# Altium PCB MainBoard3.PcbDoc
Units mm, origin at the board's own origin, x right, y up, seen from the top; angles counter-clockwise.
Board outline 140.3 x 94.24 mm, 2 copper layers (Top Layer, Bottom Layer); 100 components, 180 nets, 374 pads, 0 vias.
Unrouted connection lines stored in the file: 205.
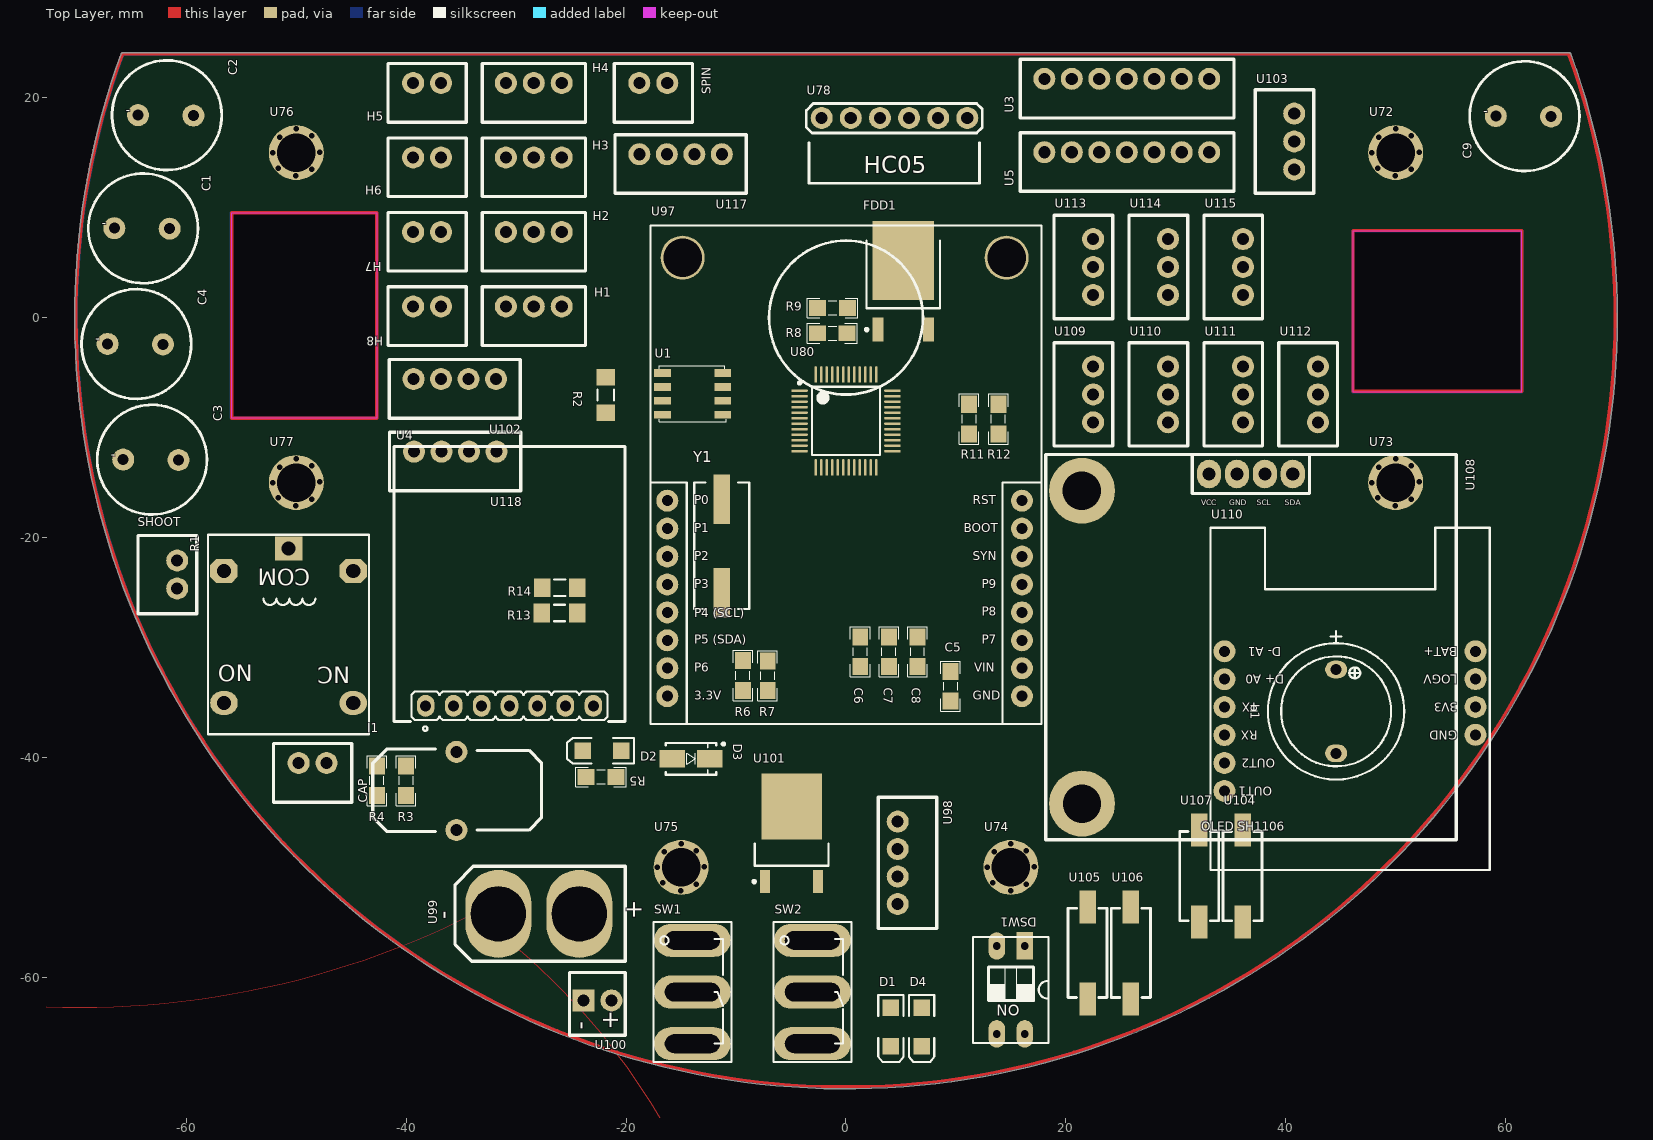
[diagram p0: Top Layer view]
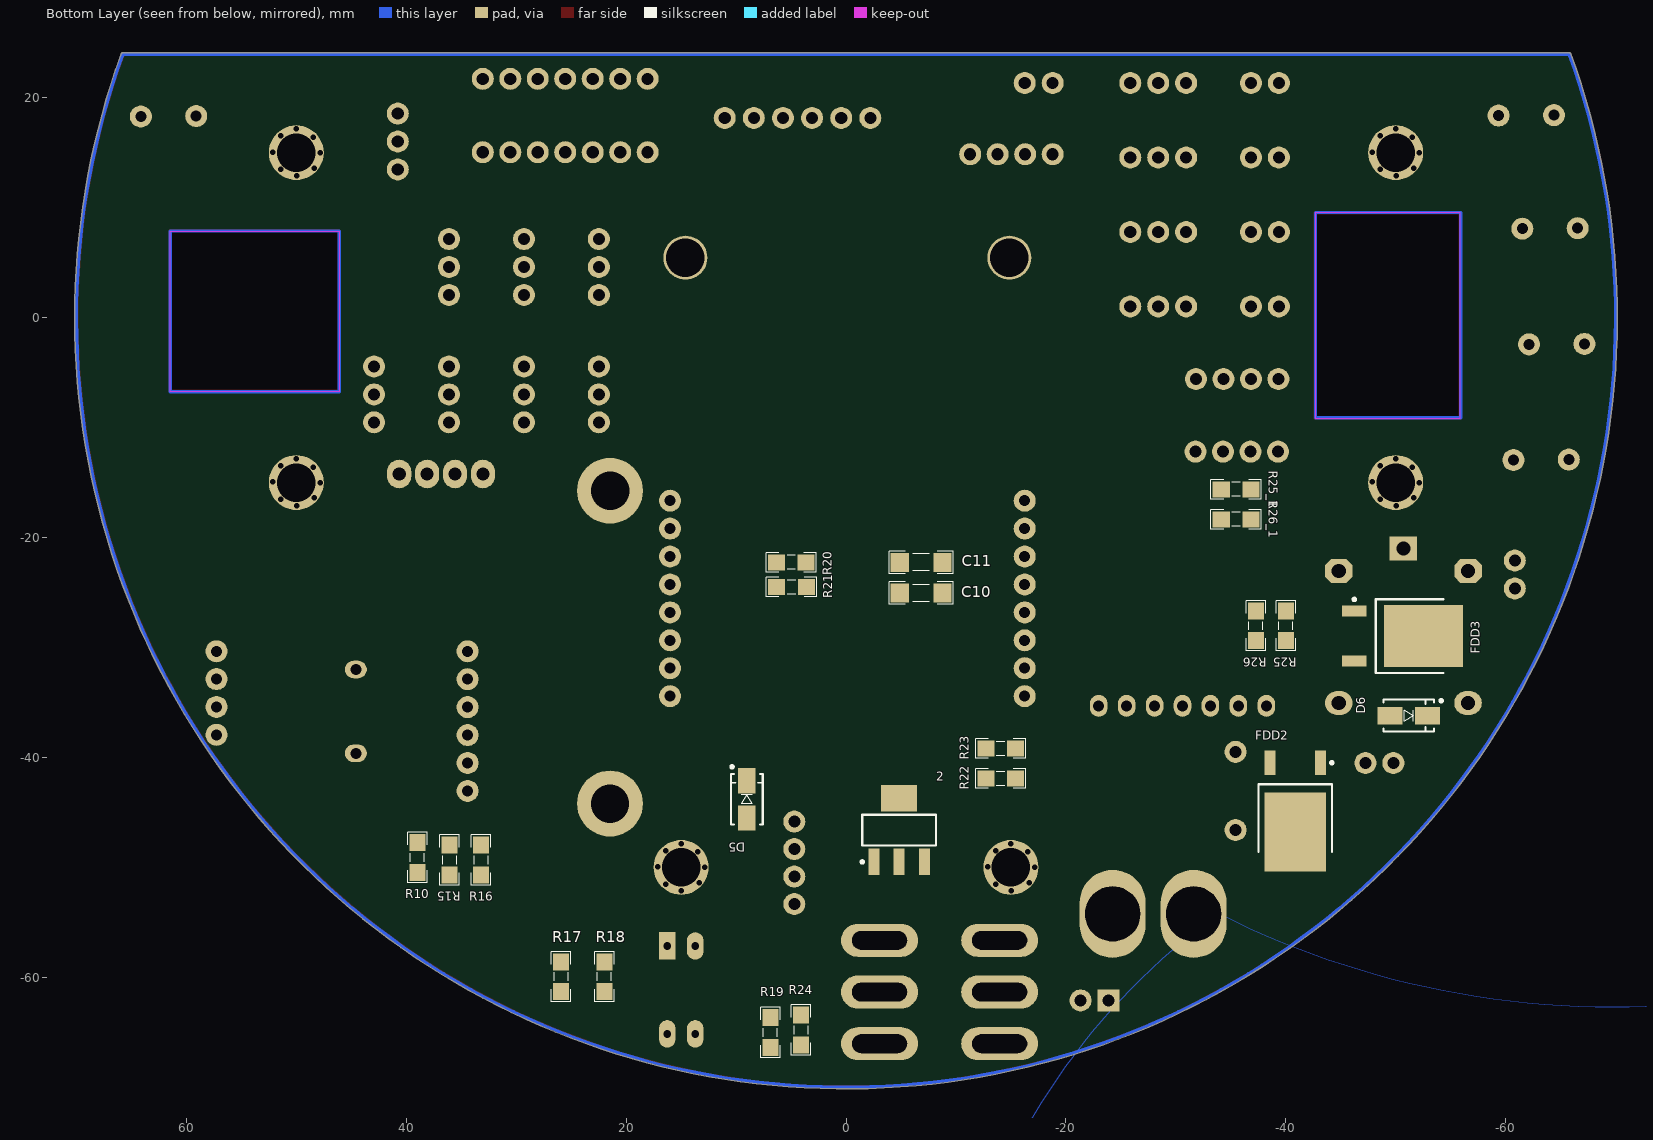
[diagram p1: Bottom Layer view, seen from below]

## Layer stack, top to bottom
Top Solder: solder mask 0.0102, Solder Resist, Dk 3.5
Top Layer: signal copper 0.0356
Dielectric 1: dielectric 0.32, FR-4, Dk 4.8
Bottom Layer: signal copper 0.0356
Bottom Solder: solder mask 0.0102, Solder Resist, Dk 3.5

## Board outline
-65.92,23.993 ccw(c0,0) 70.15,0 ccw(c0,0) 65.92,23.993 ccw(c65.778,23.941) 65.778,24.092 -65.778,24.092 ccw(c-65.778,23.941)
cut-out: 46.101,-6.731 61.468,-6.731 61.468,7.874 46.101,7.874
cut-out: -42.672,-9.144 -55.88,-9.144 -55.88,9.525 -42.672,9.525

## Design rules (kind name [scope] priority, off if disabled: settings)
Clearance [All] p1: gap=0.6 ignorepadtopadclearanceinfootprint=FALSE except(0.25: Arc-Arc Arc-Track Arc-SMDPad Track-Track Track-SMDPad SMDPad-SMDPad; 0.254: Arc-THPad Arc-Via Arc-Text Arc-Hole Track-THPad Track-Via Track-Text Track-Hole SMDPad-THPad SMDPad-Via SMDPad-Text SMDPad-Hole THPad-THPad THPad-Via THPad-Text THPad-Hole Via-Via Via-Text Via-Hole Text-Text Text-Hole; 0.5: Fill-Text Fill-Hole Poly-Text Poly-Hole Region-Text Region-Hole)
ComponentClearance [All] p1 off: gap=0.254 collisioncheckmode=3 verticalgap=0.254 showdistances=FALSE
Height [All] p1 off: minheight=0 maxheight=25.4 prefheight=12.7
PolygonConnect [All] p1: connectstyle=Direct reliefconductorwidth=0.5 reliefentries=4 polygonreliefangle="90 Angle" airgapwidth=0.5
RoutingVias [All] p1: holewidth=0.3 width=0.6 viastyle="Through Hole" minholewidth=0.25 minwidth=0.25 maxholewidth=1 maxwidth=1
SolderMaskExpansion [All] p1: expansion=0.102 istentingtop=FALSE
Width [All] p1: maxlimit=10 minlimit=0.25 preferedwidth=0.8
28 further rules are at their usual default settings.

## Components (designator, comment, footprint, x,y, rotation, side; value= is the part's Value field where it differs from the comment)
2 "Comment" SOT223_N -4.826,-46.609 r90 bottom
b1 "Comment" "BUZZER 7.62mm DC" 44.577,-35.814 r270 top
C1 "Comment" "MY_CAP_POL 10MM" -64.031,8.108 r180 top
C2 "Comment" "MY_CAP_POL 10MM" -61.872,18.395 r180 top
C3 "Comment" "MY_CAP_POL 10MM" -63.223,-12.934 r180 top
C4 "Comment" "MY_CAP_POL 10MM" -64.643,-2.413 r180 top
C5 "Comment" CAPC3413X12N 9.525,-33.528 r270 top
C6 "Comment" CAPC3413X12N 1.295,-30.392 r90 top
C7 "Comment" CAPC3413X12N 3.899,-30.392 r90 top
C8 "Comment" CAPC3413X12N 6.502,-30.392 r90 top
C9 "Comment" "MY_CAP_POL 10MM" 61.618,18.308 r180 top
C10 "0.1uF" CAPC4817X12N -6.833,-25.058 r0 bottom (schematic designator C12)
C11 "0.1uF" CAPC4817X12N -6.833,-22.264 r0 bottom
CAP "Comment" "XH 2pin" -48.514,-41.402 r180 top
D1 "SMD 1206 LED" "LED 1206" 4.089,-64.516 r270 top (schematic designator D2)
D2 "SMD 1206 LED" "LED 1206" -22.171,-39.395 r180 top
D3 "1n4007" DIOM4629X24N -14.097,-40.132 r0 top
D4 "SMD 1206 LED" "LED 1206" 6.883,-64.516 r270 top (schematic designator D2)
D5 "1n4007" DIOM4629X24N 9.017,-43.815 r90 bottom
D6 "1n4007" DIOM4629X24N -51.181,-36.195 r180 bottom (schematic designator D3)
DSW1 "Comment" "DIP Switch x2" 16.256,-57.151 r180 top
FDD1 "Comment" TO252-3M 5.207,3.307 r90 top
FDD2 "Comment" TO252-3M -40.861,-44.888 r270 bottom
FDD3 "Comment" TO252-3M -50.628,-28.962 r180 bottom
H1 "Comment" "XH 3PIN" -28.397,0.127 r180 top
H2 "Comment" "XH 3PIN" -28.397,6.9 r180 top
H3 "Comment" "XH 3PIN" -28.397,13.674 r180 top
H4 "Comment" "XH 3PIN" -28.397,20.447 r180 top
H5 "Comment" "XH 2pin" -38.1,20.447 r180 top
H6 "Comment" "XH 2pin" -38.1,13.674 r180 top
H7 "Comment" "XH 2pin" -38.1,6.9 r180 top
H8 "Comment" "XH 2pin" -38.1,0.127 r180 top
I1 "Comment" inductor -35.56,-43.053 r90 top
R1 "Comment" "Relay 18.85x15.35x15.70" -50.698,-28.028 r180 top
R2 "SMD" "Resistor SMD 1206" -21.844,-7.036 r90 top (schematic designator RES5)
R3 "Comment" RESC3413X04N -40.005,-42.117 r270 top
R4 "Comment" RESC3413X04N -42.672,-42.117 r270 top
R5 "1K" RESC3413X04N -22.286,-41.774 r180 top (schematic designator R22)
R6 "Comment" RESC3413X04N -9.373,-32.551 r270 top
R7 "Comment" RESC3413X04N -7.119,-32.574 r270 top
R8 "Comment" RESC3413X04N -1.245,-1.424 r180 top
R9 "Comment" RESC3413X04N -1.223,0.889 r180 top
R10 "Comment" RESC3413X04N 38.989,-49.102 r270 bottom
R11 "1K" RESC3413X04N 11.2,-9.23 r270 top (schematic designator R34)
R12 "1K" RESC3413X04N 13.868,-9.23 r270 top (schematic designator R35)
R13 "SMD" "Resistor SMD 1206" -26.06,-26.862 r0 top (schematic designator RES3)
R14 "SMD" "Resistor SMD 1206" -26.035,-24.576 r180 top (schematic designator RES2)
R15 "1K" RESC3413X04N 36.061,-49.338 r90 bottom (schematic designator R22)
R16 "Comment" RESC3413X04N 33.187,-49.338 r270 bottom
R17 "1K" RESC3413X04N 25.908,-59.944 r270 bottom (schematic designator R23)
R18 "1K" RESC3413X04N 21.971,-59.944 r270 bottom (schematic designator R23)
R19 "1K" RESC3413X04N 6.883,-65.024 r270 bottom (schematic designator R22)
R20 "Comment" RESC3413X04N 4.978,-22.264 r180 bottom
R21 "Comment" RESC3413X04N 4.956,-24.518 r180 bottom
R22 "Comment" RESC3413X04N -14.068,-41.928 r180 bottom
R23 "Comment" RESC3413X04N -14.068,-39.203 r180 bottom
R24 "1K" RESC3413X04N 4.089,-64.798 r270 bottom (schematic designator R22)
R25 "Comment" RESC3413X04N -40.005,-28.032 r90 bottom
R25_1 "Comment" RESC3413X04N -35.48,-15.621 r0 bottom
R26 "Comment" RESC3413X04N -37.279,-28.032 r90 bottom
R26_1 "Comment" RESC3413X04N -35.48,-18.347 r0 bottom
SHOOT "Comment" "XH 2pin" -61.722,-23.368 r90 top
SPIN "Comment" "XH 2pin" -17.526,20.447 r180 top
SW1 "Comment" "Switch SPDT - 500x270x1100x185 mil" -13.97,-61.341 r0 top
SW2 "Comment" "Switch SPDT - 500x270x1100x185 mil" -3.048,-61.341 r0 top
U1 "SN65LB" SOIC8 -13.843,-7.112 r180 top (schematic designator evajedi)
U3 "Comment" "XH 7PIN" 25.513,23.241 r180 top
U4 "TDAxis12" TDAxis12 -30.607,-35.231 r0 top (schematic designator U2)
U5 "Comment" "XH 7PIN" 25.513,16.566 r180 top
U72 "Comment" SCREW 50,15 r0 top locked
U73 "Comment" SCREW 50,-15 r0 top locked
U74 "Comment" SCREW 15,-50 r0 top locked
U75 "Comment" SCREW -15,-50 r0 top locked
U76 "Comment" SCREW -50,15 r0 top locked
U77 "Comment" SCREW -50,-15 r0 top locked
U78 "Comment" HC05 4.392,12.861 r0 top
U80 "Comment" STM32F103C8T6 0,-9.398 r0 top
U97 "Comment" OpenMV 0,-15 r0 top locked
U98 "Comment" "XH 4PIN" 5.588,-49.593 r270 top
U99 "Comment" XT60 -26.416,-54.229 r270 top
U100 "Comment" "H2 MOLEX" -22.606,-62.484 r270 top
U101 "Comment" "7805 (SOT-252)" -4.953,-46.9 r90 top
U102 "Comment" "XH 4PIN" -35.583,-6.477 r180 top
U103 "Comment" "XH 3PIN" 39.878,16.016 r90 top
U104 "Comment" pushbutton 36.068,-50.8 r90 top
U105 "Comment" pushbutton 21.971,-57.785 r90 top
U106 "Comment" pushbutton 25.908,-57.785 r90 top
U107 "Comment" pushbutton 32.131,-50.8 r90 top
U108 "Comment" "OLED SH1106" 36.83,-29.972 r0 top
U109 "Comment" "XH 3PIN" 21.59,-6.985 r90 top
U110 "Comment" "RCJ Communication Module" 45.85,-30.037 r180 top
U110 "Comment" "XH 3PIN" 28.406,-6.985 r90 top
U111 "Comment" "XH 3PIN" 35.221,-6.985 r90 top
U112 "Comment" "XH 3PIN" 42.037,-6.985 r90 top
U113 "Comment" "XH 3PIN" 21.59,4.602 r90 top
U114 "Comment" "XH 3PIN" 28.406,4.602 r90 top
U115 "Comment" "XH 3PIN" 35.221,4.602 r90 top
U117 "Comment" "XH 4PIN" -15.049,13.97 r180 top
U118 "Comment" "XH 4PIN" -35.543,-13.081 r180 top
Y1 "12 MHz" "Crystal SMD" -11.303,-20.76 r90 top

## Footprints (in the part's own frame and the unit in brackets; to place one, negate y for a bottom-side part, rotate by r counter-clockwise, add the part's x,y. Pads: shape width x height; smd on the part's side, far side on the other; paste and mask are expansions set on the pad)
"7805 (SOT-252)" [mm] "D-PAK, 3-Pads, Body 6.25x6.71mm (max), IPC Medium Density"
  rect 2.1x0.9 smd: 1(-4.4,2.4) 3(-4.4,-2.4)
  rect 6x5.5 smd: 4(2.45,0)
  silkscreen extent -4.52,-3.35 -0.95,3.52, body extent -5.06,-3.35 4.85,3.35, height 2.45
"BUZZER 7.62mm DC" [mm] "BUZZER 12mm DIA , 7.62mm pitch DESIGNER ABBAS BASEREH"
  oval 1.6x2 hole 1: 1(-3.81,0) 2(3.81,0)
  silkscreen extent -7.3,-6.2 6.2,6.2, body extent -6,-6 6,6, height 9.5
CAPC3413X12N [mm] "Chip Capacitor, 2-Leads, Body 3/40x1/30mm, IPC Medium Density-Design:Abbas Basereh"
  rect 1.55x1.45 smd: 1(-1.35,0) 2(1.35,0)
  silkscreen extent -2.29,-0.89 2.29,0.89, body extent -1,-0.62 1,0.63, height 0.78
CAPC4817X12N [mm] "Chip Capacitor, 2-Leads, Body 4/80x1/70mm, IPC Medium Density-Design:Abbas Basereh"
  rect 1.65x1.75 smd: 1(-1.95,0) 2(1.95,0)
  silkscreen extent -2.92,-1.02 2.92,1.02, body extent -1.6,-0.8 1.6,0.8, height 1
"Crystal SMD" [mm] "DESIGNER ABBAS BASEREH"
  rect 4.5x1.5 smd: 1(-4.25,0) 2(4.25,0)
  silkscreen extent -5.75,-2.5 5.75,2.5, body extent -6.21,-2.25 6.09,2.25, height 5.18
DIOM4629X24N [mm] "Molded Diode, 2-Leads, Body 4/60x2/90mm, IPC Medium Density-Design:Abbas Basereh"
  rect 2.3x1.6 smd: 1(-1.7,0) 2(1.7,0)
  silkscreen extent -2.3,-1.45 3.08,1.47, body extent -2.5,-1.22 2.5,1.48, height 2.2
"DIP Switch x2" [mm] "Switch DIP 2 way flat slide Thru-Hole-Design:Ali Hafizi"
  rect 1.5x2.5 hole 0.7: 1(0,0)
  oval 1.5x2.5 hole 0.7: 2(2.54,0) 3(2.54,8) 4(0,8)
  silkscreen extent -2.16,-0.82 4.71,8.83, body extent -1.98,-1.03 4.52,8.97, height 6.91
"H2 MOLEX" [mm]
  round 2 hole 1.1: 1(-0.381,1.27)
  rect 2x2 hole 1.1: 2(-0.381,-1.27)
  silkscreen extent -2.92,-2.54 2.79,2.54, body extent -2.9,-2.54 2.9,2.54, height 11.24
HC05 [mm]
  round 2 hole 1.1: 1(-6.605,5.3) 2(-3.956,5.3) 3(-1.308,5.3) 4(1.341,5.3) 5(3.99,5.3) 6(6.639,5.3)
  silkscreen extent -8,-0.64 8,6.6, body extent -8,-1 8,5.55, height 39.5
inductor [mm]
  round 2 hole 1.1: 1(-3.556,-0.127) 2(3.556,-0.127)
  silkscreen extent -3.68,-7.87 3.81,7.49, body extent -4.15,-8.42 4.15,8.17, height 16.29
"LED 1206" [mm]
  rect 1.5x1.5 smd: 1(-1.75,0) 2(1.75,0)
  silkscreen extent -2.9,-1.15 3.2,1.15, body extent -1.65,-0.72 1.65,0.73, height 1.36
"MY_CAP_POL 10MM" [mm]
  round 2 hole 1: +(-2.517,0.02) -(2.517,-0.02)
  silkscreen extent -5.09,-5 4.88,4.98, body extent -5.13,-5.07 5.03,5.09, height 10.16
"OLED SH1106" [mm]
  oval 2.2x2.6 hole 1.2: 1(-3.81,15.748) 2(-1.27,15.748) 3(1.27,15.748) 4(3.81,15.748)
  round 6 hole 3.5: ""(-15.367,14.224) ""(-15.365,-14.23)
  silkscreen extent -18.67,-17.53 18.67,17.53, body extent -18,-17 18,17, height 9.6
OpenMV [mm]
  round 2 hole 1: 1(-16.256,-19.431) 2(-16.256,-16.891) 3(-16.256,-14.351) 4(-16.256,-11.811) 5(-16.256,-9.271) 6(-16.256,-6.731) 7(-16.256,-4.191) 8(-16.256,-1.651) 9(16.002,-19.431) 10(16.002,-16.891) 11(16.002,-14.351) 12(16.002,-11.811) 13(16.002,-9.271) 14(16.002,-6.731) 15(16.002,-4.191) 16(16.002,-1.651)
  round 4 hole 3.5: 17(14.605,20.447) 18(-14.859,20.447)
  silkscreen extent -17.78,-21.97 17.78,23.37, body extent -17.92,-22.12 17.9,23.58, height 38.95
pushbutton [mm]
  rect 3x1.5 smd: 1(-4.191,0) 2(4.191,0)
  silkscreen extent -4.06,-1.78 4.06,1.78, body extent -4.17,-1.82 4.17,1.82, height 4.25
"RCJ Communication Module" [mm]
  round 2 hole 1: 1(-11.407,0.31) 2(-11.407,2.842) 3(-11.407,5.374) 4(-11.407,7.907) 5(11.433,0.31) 6(11.433,2.851) 7(11.433,5.392) 8(11.433,7.933) 9(11.433,10.475) 10(11.433,13.016)
  silkscreen extent -12.7,-10.92 12.7,20.19, body extent -12.7,-11.04 12.7,25.4, height 11.35
"Relay 18.85x15.35x15.70" [mm]
  rect 2.5x2.2 hole 1.3: 1(0,-7.025)
  oval 2.5x2.2 hole 1.3: 2(-5.875,7.025) 3(5.875,7.025)
  oct 2.5x2.2 hole 1.3: 4(-5.875,-4.975) 5(5.875,-4.975)
  silkscreen extent -7.33,-8.27 7.33,9.88, body extent -7.37,-8.72 7.63,9.98, height 15.7
RESC3413X04N [mm] "Chip Resistor, 2-Leads, Body 3/40x1/30mm, IPC Medium Density-Design:Abbas Basereh"
  rect 1.55x1.45 smd: 1(-1.35,0) 2(1.35,0)
  silkscreen extent -2.29,-0.89 2.29,0.89, body extent -1.25,-0.62 1.25,0.62, height 0.79
"Resistor SMD 1206" [mm]
  rect 1.5x1.7 smd: 1(-1.6,0) 2(1.6,0)
  silkscreen extent -0.5,-0.75 0.5,0.75, body extent -1.6,-0.8 1.6,0.8, height 0.55
SCREW [mm]
  round 5 hole 3.5: 1(0,0)
  round 0 hole 0.5: ""(-2.159,0) ""(-1.651,-1.397) ""(-1.524,1.397) ""(-0.031,-2.11) ""(0,2.159) ""(1.397,-1.524) ""(1.397,1.524) ""(2.128,0.059)
SOIC8 [mm]
  rect 1.524x0.7 smd: 1(-2.624,1.733) 2(-2.624,0.463) 3(-2.624,-0.807) 4(-2.624,-2.077) 5(2.856,-2.077) 6(2.856,-0.807) 7(2.856,0.463) 8(2.856,1.733)
  silkscreen extent -2.93,-2.71 3.16,2.37, body extent -2.88,-2.62 3.12,2.28, height 1.75
SOT223_N [mm] "SOT223, 4-Leads, Body 6.5x3.5mm, Pitch 2.3mm, Lead Span 7mm, IPC Medium Density"
  rect 2.4x1 smd: 1(-2.9,2.3) 2(-2.9,0) 3(-2.9,-2.3)
  rect 2.4x3.3 smd: 4(2.9,0)
  silkscreen extent -3.02,-3.35 1.4,3.48, body extent -1.85,-3.35 1.85,3.35, height 1.7
STM32F103C8T6 [mm] "TSQFP, 48-Leads, Body 7.00x7.00mm, Pitch 0.50mm, IPC Medium Density"
  oval 1.5x0.25 smd: 1(-4.225,2.75) 2(-4.225,2.25) 3(-4.225,1.75) 4(-4.225,1.25) 5(-4.225,0.75) 6(-4.225,0.25) 7(-4.225,-0.25) 8(-4.225,-0.75) 9(-4.225,-1.25) 10(-4.225,-1.75) 11(-4.225,-2.25) 12(-4.225,-2.75) 25(4.225,-2.75) 26(4.225,-2.25) 27(4.225,-1.75) 28(4.225,-1.25) 29(4.225,-0.75) 30(4.225,-0.25) 31(4.225,0.25) 32(4.225,0.75) 33(4.225,1.25) 34(4.225,1.75) 35(4.225,2.25) 36(4.225,2.75)
  oval 0.25x1.5 smd: 13(-2.75,-4.225) 14(-2.25,-4.225) 15(-1.75,-4.225) 16(-1.25,-4.225) 17(-0.75,-4.225) 18(-0.25,-4.225) 19(0.25,-4.225) 20(0.75,-4.225) 21(1.25,-4.225) 22(1.75,-4.225) 23(2.25,-4.225) 24(2.75,-4.225) 37(2.75,4.225) 38(2.25,4.225) 39(1.75,4.225) 40(1.25,4.225) 41(0.75,4.225) 42(0.25,4.225) 43(-0.25,4.225) 44(-0.75,4.225) 45(-1.25,4.225) 46(-1.75,4.225) 47(-2.25,4.225) 48(-2.75,4.225)
  silkscreen extent -4.35,-3.1 3.1,3.57, body extent -4.5,-4.5 4.5,4.5, height 1.6
"Switch SPDT - 500x270x1100x185 mil" [mm]
  oval 7x3 hole 1.7 slot 5 at 0 deg: 1(0,-4.699) 2(0,0) 3(0,4.699)
  silkscreen extent -3.56,-6.35 3.56,6.35, body extent -3.42,-6.35 3.44,6.35, height 28.62
TDAxis12 [mm] "Connector; Header; 7 Position"
  oval 1.6x2 hole 1 mask+0.1: 1(-7.62,-0.075) 2(-5.08,-0.075) 3(-2.54,-0.075) 4(0,-0.075) 5(2.54,-0.075) 6(5.08,-0.075) 7(7.62,-0.075)
  silkscreen extent -10.5,-2.35 10.5,23.5, body extent -10.5,-1.5 10.5,23.5, height 11.39
TO252-3M [mm] "D-PAK, 3-Pads, Body 6.2x6.7mm (max), IPC Low Density"
  rect 2.2x1 smd: 1(-4.4,2.28) 3(-4.4,-2.28)
  rect 7.2x5.6 smd: 4(1.9,0)
  silkscreen extent -4.52,-3.35 3.7,3.45, body extent -5.06,-3.27 4.88,3.27, height 2.39
"XH 2pin" [mm]
  round 2 hole 1.1: 1(-1.27,-0.889) 2(1.27,-0.889)
  silkscreen extent -3.56,-2.67 3.56,2.67, body extent -3.7,-2.88 3.7,2.88, height 7
"XH 3PIN" [mm]
  round 2 hole 1.1: 1(-2.54,-0.889) 2(0,-0.889) 3(2.54,-0.889)
  silkscreen extent -4.7,-2.67 4.7,2.67, body extent -4.95,-2.88 4.95,2.88, height 7
"XH 4PIN" [mm]
  round 2 hole 1.1: 1(-3.753,-0.889) 2(-1.253,-0.889) 3(1.247,-0.889) 4(3.747,-0.889)
  silkscreen extent -5.97,-2.67 5.97,2.67, body extent -6.2,-2.88 6.2,2.88, height 7
"XH 7PIN" [mm]
  round 2 hole 1.1: 1(-7.523,1.524) 2(-5.023,1.524) 3(-2.523,1.524) 4(-0.023,1.524) 5(2.477,1.524) 6(4.977,1.524) 7(7.477,1.524)
  silkscreen extent -9.78,-0.25 9.65,5.08, body extent -9.95,-0.46 9.95,5.29, height 7
XT60 [mm]
  oval 8x6 hole 5: 1(0,2.159) 2(0,-5.207)
  silkscreen extent -4.32,-9.14 4.32,6.35, body extent -3.75,-9.72 3.75,6.83, height 16

## Part data
C10 C11: library part "CAP SMD 1206", "CAP 1206", Data=16-12-2016, Desc.="CAP SMD 1206", Designer="Abbas Basereh"
D1 D2 D4: library part "LED SMD 1206"
D3 D5 D6: library part "1n4007 SMD M7", "Standard Rectifiers", Manufacturer="DC COMPONENTS", Data=16-12-2016, Designer="Abbas Basereh", Link=http://www.tme.eu/en/details/m7/smd-universal-diodes/dc-components/, Part. No=M7
R2 R13 R14: library part "Res SMD"
R5 R11 R12 R15 R17 R18 R19 R24: library part "RES 0805 0.125W", "RES 0805", Data=16-12-2016, Desc.="RES SMD 0805", Designer="Abbas Basereh"
U4: "Module, 12 Axis IMU, I2C UART Output"
Y1: library part XTAL, "XTAL Crystal", ComponentLink1Description=Datasheet, ComponentLink2Description=Reference, Design Date=2017-1-3, Designer="ABBAS BASEREH", Mounting Technology="Surface Mount\Through-Hole", Status=Unreleased

## Nets (pads, with @x,y where several pads share a name; then routed paths per layer and width w, separated by ;. In a path a pad name is that pad's centre, name@x,y a point inside that pad or via, vN(x,y) a via of type N, cw(c..) or ccw(c..) an arc to the next point about the centre after c; other vN are vias at no path point)
3.3V: 
5V: 2.3 C5.2 R1.4 U97.10 U101.3
12V: SW2.3 U101.1
+3.3V: 
+5: 
A: H1.3 H2.3 H3.3 H4.3 R2.2 U1.6
ADC0: U3.1 U80.10 U112.1
ADC1: U5.1 U80.11 U111.1
ADC2: U80.12 U110.1@29.295,-9.525
ADC3: U80.13 U109.1
ADC4: U80.14 U115.1
ADC5: U80.15 U114.1
ADC6: U80.16 U113.1
ADC7: R25_1.2 R26_1.2 U80.17
ADC8: U80.18 U103.1
ADC9: R22.1 R23.1 U80.19
ADC10: U80.20
ADC11: 
ADC12: 
ADC13: 
ADC14: 
ADC15: 
ADCOUT: 
ADD0: 
ADD1: U3.2
ADD2: U3.3
ADD3: U3.4
ADD4: U3.5
"AIR MIX MA +": 
"AIR MIX MA -": 
B: H1.2 H2.2 H3.2 H4.2 R2.1 U1.7
b11: 
b12: 
b13: 
b14: 
b21: 
b22: 
b23: 
b24: 
BAT_Volt: 
BOOST_CTRL: R4.1 U80.46
BOOST_FB: 
BOOT0: R17.2 U80.44 U106.1
buz: b1.1 R10.2
Buzzer: R10.1 U80.39
DIP1: DSW1.4 R7.2 U80.40
DIP2: DSW1.3 R6.2 U80.41
DIPSW1: 
DIPSW2: 
ENA_1: 
ENA_2: 
ENA_3: 
ENA_4: 
ENB_1: 
ENB_2: 
ENB_3: 
ENB_4: 
GATE: FDD1.1 R8.1 R9.1
GATE_BOOST: FDD2.1 R3.2 R4.2
GATE_RELAY: FDD3.1 R25.2 R26.2
GND: 2.1 b1.2 C1.- C2.- C3.- C4.- C5.1 C6.1 C7.1 C8.1 C9.- C10.2 C11.2 CAP.1 FDD1.3 FDD2.3 FDD3.3 H5.1 H6.1 H7.1 H8.1 R3.1 R5.1 R6.1 R7.1 R8.2 R13.1 R15.1 R16.2 R17.1 R19.1 R21.2 R22.2 R24.1 R25_1.1 R26.1 SHOOT.1 U1.5 U3.7 U4.2 U80.8 U80.23 U80.35 U97.9 U98.1 U99.2 U100.2 U101.4 U102.3 U103.3 U105.2 U108.2 U109.3 U110.3@29.295,-4.445 U111.3 U112.3 U113.3 U114.3 U115.3 U117.3 U118.3
I2C_SCL: 
I2C_SDA: 
ID: R20.1 R21.1 U80.33
INA1: 
INA2: U80.27
INA3: U80.26
INA4: U80.25
INA_1: 
INA_2: 
INA_3: 
INA_4: 
INB1: 
INB2: 
INB3: 
INB4: 
INB_1: 
INB_2: 
INB_3: 
INB_4: 
Inductor: D6.1 FDD2.4 I1.1
IO: U1.2 U1.3 U80.45
LED1: D1.2 R24.2
LED2: D4.2 R19.2
LED3: D2.1 U80.2
LED3_RES: D2.2 R5.2
LED4: 
LED5: 
M1: FDD1.4 SPIN.2
MA1: 
MA2: 
MA3: 
MA4: 
MB1: 
MB2: 
MB3: 
MB4: 
"MODE MA +": 
"MODE MA -": 
MOTOR: 
MOTORS_EN: 
NET1: R13.2 R14.1 U4.7
NetD5_1: D5.1 U98.4
NewNet: 
NRST: R18.2 U80.7 U105.1
OSC_IN: C11.1 U80.5 Y1.2
OSC_OUT: C10.1 U80.6 Y1.1
OUT: 
OUT_1A: 
OUT_1B: 
OUT_2A: 
OUT_2B: 
OUT_3A: 
OUT_3B: 
OUT_4A: 
OUT_4B: 
PWM1: U80.43
PWM2: 
PWM3: U80.42
PWM4: U80.29
PWM_1: 
PWM_2: 
PWM_3: 
PWM_4: 
RELAY: FDD3.4 R1.5
RELAY_CTRL: 
RES1: 
RES2: 
RES3: 
RES4: 
RES5: 
RX: U1.4 U80.31 U117.2
RX2: 
S3: 
S4: 
S5: 
S6: 
S7: 
S8: 
S9: 
S10: 
S11: 
S12: 
S13: 
S14: 
S15: 
SCL: R11.1 U4.5 U80.21 U97.4 U102.2 U108.3 U118.2
SDA: R12.1 U4.6 U80.22 U97.3 U102.1 U108.4 U118.1
SHIFT5: 
shoot: R25.1 U80.4
spin: R9.2 U80.3
SW1: R16.1 U80.38 U107.2
SW2: R15.2 U80.32 U104.2
SW3: 
SW4: 
SW5: 
SWCLK: U80.37 U98.2
SWDIO: U80.34 U98.3
SWR1: 
SWR2: 
SWR3: 
SWR4: 
SWR5: 
TX: U1.1 U80.30 U117.1
TX2: 
UART1_RX: 
UART1_TX: 
UART2_RX: 
UART2_TX: 
VBat: D3.1 U99.1 U100.1
VBOOST: CAP.2 D6.2 R1.3
VCC: 2.2 2.4 C6.2 C7.2 C8.2 C9.+ D4.1 D5.2 DSW1.1 DSW1.2 R11.2 R12.2 R14.2 R18.1 R20.2 U1.8 U3.6 U4.1 U80.9 U80.24 U80.36 U80.48 U102.4 U103.2 U104.1 U106.2 U107.1 U108.1 U109.2 U110.2@29.295,-6.985 U111.2 U112.2 U113.2 U114.2 U115.2 U117.4 U118.4
VIN: D3.2 SW1.2 SW2.2
VP: 
VREF1: 
VREF2: 
VREF3: 
VREF4: 
VSHOOT: R1.1 R26_1.1 SHOOT.2
VSS: C1.+ C2.+ C3.+ C4.+ D1.1 H5.2 H6.2 H7.2 H8.2 I1.2 R23.2 SPIN.1 SW1.3
pads on no net: H1.1 H2.1 H3.1 H4.1 R1.2 SW1.1 SW2.1 U4.3 U4.4 U5.2 U5.3 U5.4 U5.5 U5.6 U5.7 U72. U72.1 U73. U73.1 U74. U74.1 U75. U75.1 U76. U76.1 U77. U77.1 U78.1 U78.2 U78.3 U78.4 U78.5 U78.6 U80.1 U80.28 U80.47 U97.1 U97.2 U97.5 U97.6 U97.7 U97.8 U97.11 U97.12 U97.13 U97.14 U97.15 U97.16 U97.17 U97.18 U108. U110.1@57.257,-30.347 U110.2@57.257,-32.88 U110.3@57.257,-35.412 U110.4 U110.5 U110.6 U110.7 U110.8 U110.9 U110.10
copper on no net: | length 1099.8
  Top Layer w0.3: -65.822,23.968 ccw(c-0.044,0.027) 65.734,23.968 -65.822,23.968 ; -55.88,-9.144 -42.672,-9.144 -42.672,9.525 -55.88,9.525 -55.88,-9.144 ; 46.115,-6.689 61.482,-6.689 61.482,7.916 46.115,7.916 46.115,-6.689
  Bottom Layer w0.254: -55.347,-291.123 -55.347,-290.615 ; -53.823,-291.377 -55.347,-290.869 ; -53.823,-290.361 -55.347,-290.869 ; -33.208,-290.869 -55.347,-290.869 ; -17.414,-290.869 4.724,-290.869 ; 3.2,-291.377 4.724,-290.869 ; 3.2,-290.361 4.724,-290.869 ; 4.724,-291.123 4.724,-290.615
  Bottom Layer w0.3: -65.778,23.941 ccw(c0,0) 65.778,23.941 -65.778,23.941 ; -55.908,-9.111 -42.7,-9.111 -42.7,9.558 -55.908,9.558 -55.908,-9.111 ; 46.101,-6.731 61.468,-6.731 61.468,7.874 46.101,7.874 46.101,-6.731

## Polygon pours and split planes (outlines as drawn)
GND on Top Layer "NONET_L01_P002" (solid, shelved, pour order 2): -117.08,-152.197 cw(c-69.444,-103.671) -131.72,-130.978 -131.775,-130.926 -135.204,-130.926 -135.23,-130.934 -135.23,-120.943 -127.965,-120.943 -127.962,-120.959 cw(c-69.418,-103.824) -127.708,-85.842 -127.737,-85.815 -135.306,-85.815 -135.306,-76.824 -135.331,-76.773 -124.409,-76.773 -124.286,-76.732 cw(c-69.52,-103.595) -105.451,-54.301 -105.441,-54.28 ccw(c-69.715,17.002) -33.911,-54.24 -33.85,-54.252 cw(c-69.469,-103.773) -15.167,-75.982 -15.113,-75.985 -3.708,-75.985 -3.708,-86.018 -3.759,-86.044 -11.074,-86.044 -11.071,-86.155 cw(c-69.494,-103.697) -11.035,-121.118 -11.05,-121.139 -3.786,-121.122 -3.81,-121.121 -3.81,-131.078 -7.239,-131.078 -7.214,-131.084 cw(c-69.444,-103.671) -22.228,-152.607 -22.301,-152.693 -29.553,-145.442 -29.552,-145.442 cw(c-69.63,-103.725) -44.097,-155.635 -44.145,-155.645 -44.145,-168.949 -44.241,-168.977 cw(c-69.444,-103.671) -94.814,-168.912 -94.818,-168.899 -94.869,-155.721 -94.963,-155.682 cw(c-69.418,-103.671) -110.009,-145.023 -110.033,-145.124
GND on Bottom Layer "NONET_L02_P003" (solid, shelved, pour order 3): -117.08,-152.197 cw(c-69.444,-103.671) -131.72,-130.978 -131.775,-130.926 -135.204,-130.926 -135.23,-130.934 -135.23,-120.943 -127.965,-120.943 -127.962,-120.959 cw(c-69.418,-103.824) -127.708,-85.842 -127.737,-85.815 -135.306,-85.815 -135.306,-76.824 -135.331,-76.773 -124.409,-76.773 -124.286,-76.732 cw(c-69.52,-103.595) -105.451,-54.301 -105.441,-54.28 ccw(c-69.715,17.002) -33.911,-54.24 -33.85,-54.252 cw(c-69.469,-103.773) -15.167,-75.982 -15.113,-75.985 -3.708,-75.985 -3.708,-86.018 -3.759,-86.044 -11.074,-86.044 -11.071,-86.155 cw(c-69.494,-103.697) -11.035,-121.118 -11.05,-121.139 -3.786,-121.122 -3.81,-121.121 -3.81,-131.078 -7.239,-131.078 -7.214,-131.084 cw(c-69.444,-103.671) -22.228,-152.607 -22.301,-152.693 -29.553,-145.442 -29.552,-145.442 cw(c-69.63,-103.725) -44.097,-155.635 -44.145,-155.645 -44.145,-168.949 -44.241,-168.977 cw(c-69.444,-103.671) -94.814,-168.912 -94.818,-168.899 -94.869,-155.721 -94.963,-155.682 cw(c-69.418,-103.671) -110.009,-145.023 -110.033,-145.124

## Other copper
Bottom Layer:
  text "60.071 (mm)" at -32.954,-291.784 h1.52

## Silkscreen, mask and mechanical layers (free items; w line width, h text height)
Top Solder:
  lines w0.3: -65.841,23.962 ccw(c-0.063,0.021) 65.716,23.962 -65.841,23.962 ; -55.88,-9.095 -42.672,-9.095 -42.672,9.574 -55.88,9.574 -55.88,-9.095 ; 46.101,-6.731 61.468,-6.731 61.468,7.874 46.101,7.874 46.101,-6.731
Bottom Solder:
  lines w0.3: -65.841,23.968 ccw(c-0.063,0.027) 65.716,23.968 -65.841,23.968 ; -55.88,-9.144 -55.88,9.525 -42.672,9.525 -42.672,-9.144 -55.88,-9.144 ; 46.101,-6.731 46.101,7.874 61.468,7.874 61.468,-6.731 46.101,-6.731
Mechanical 1:
  lines w0.3: -65.778,23.941 ccw(c0,0) 65.778,23.941 -65.778,23.941 ; -55.88,-9.144 -55.88,9.525 -42.672,9.525 -42.672,-9.144 -55.88,-9.144 ; 46.126,-6.731 61.493,-6.731 61.493,7.874 46.126,7.874 46.126,-6.731

## Text inside footprints (layer, text, board x,y; h text height)
C1: Top Overlay "-" at -67.278,8.861 h0.8 r180
C2: Top Overlay "-" at -65.119,19.148 h0.8 r180
C3: Top Overlay "-" at -66.47,-12.18 h0.8 r180
C4: Top Overlay "-" at -67.89,-1.66 h0.8 r180
C9: Top Overlay "-" at 58.371,19.062 h0.8 r180
DSW1: Top Overlay "ON" at 15.816,-62.511 h1 r180
R1: Top Overlay "COM" at -48.717,-22.846 h1.5 r180; Top Overlay "NO" at -53.95,-31.584 h1.5 r180; Top Overlay "NC" at -45.11,-31.761 h1.5 r180
U78: Top Overlay "HC05" at 1.599,13.115 h1.52
U97: Top Overlay "P0" at -13.79,-16.979 h0.8; Top Overlay "P1" at -13.79,-19.519 h0.8; Top Overlay "P2" at -13.79,-22.059 h0.8; Top Overlay "P3" at -13.79,-24.599 h0.8; Top Overlay "3.3V" at -13.79,-34.759 h0.8; Top Overlay "P6" at -13.79,-32.219 h0.8; Top Overlay "P7" at 12.33,-29.679 h0.8; Top Overlay "P8" at 12.33,-27.139 h0.8; Top Overlay "P9" at 12.33,-24.599 h0.8; Top Overlay "SYN" at 11.53,-22.059 h0.8; Top Overlay "BOOT" at 10.731,-19.519 h0.8; Top Overlay "RST" at 11.53,-16.979 h0.8; Top Overlay "P4 (SCL)" at -13.79,-27.266 h0.8; Top Overlay "P5 (SDA)" at -13.79,-29.679 h0.8; Top Overlay "VIN" at 11.664,-32.219 h0.8; Top Overlay "GND" at 11.53,-34.759 h0.8
U99: Top Overlay "-" at -37.084,-54.737 h1.52 r270; Top Overlay "+" at -19.939,-54.737 h1.52 r270
U100: Top Overlay "-" at -24.638,-64.77 h1.52 r270; Top Overlay "+" at -22.098,-64.77 h1.52 r270
U108: Top Overlay "OLED SH1106" at 32.317,-46.683 h0.8; Top Overlay "SDA" at 39.915,-17.045 h0.5; Top Overlay "SCL" at 37.375,-17.045 h0.5; Top Overlay "GND" at 34.835,-17.045 h0.5; Top Overlay "VCC" at 32.295,-17.045 h0.5
U110: Top Overlay "D+ A0" at 39.856,-32.504 h0.8 r180; Top Overlay "OUT1" at 38.789,-42.669 h0.8 r180; Top Overlay "OUT2" at 39.056,-40.128 h0.8 r180; Top Overlay "RX" at 37.457,-37.587 h0.8 r180; Top Overlay "TX" at 37.457,-35.046 h0.8 r180; Top Overlay "D- A1" at 39.589,-29.963 h0.8 r180; Top Overlay "GND" at 55.576,-37.56 h0.8 r180; Top Overlay "3V3" at 55.576,-35.028 h0.8 r180; Top Overlay "LOGV" at 55.576,-32.496 h0.8 r180; Top Overlay "BAT+" at 55.576,-29.963 h0.8 r180